# EAGLE board porcupine5v1_4 (EAGLE 6.5.0)
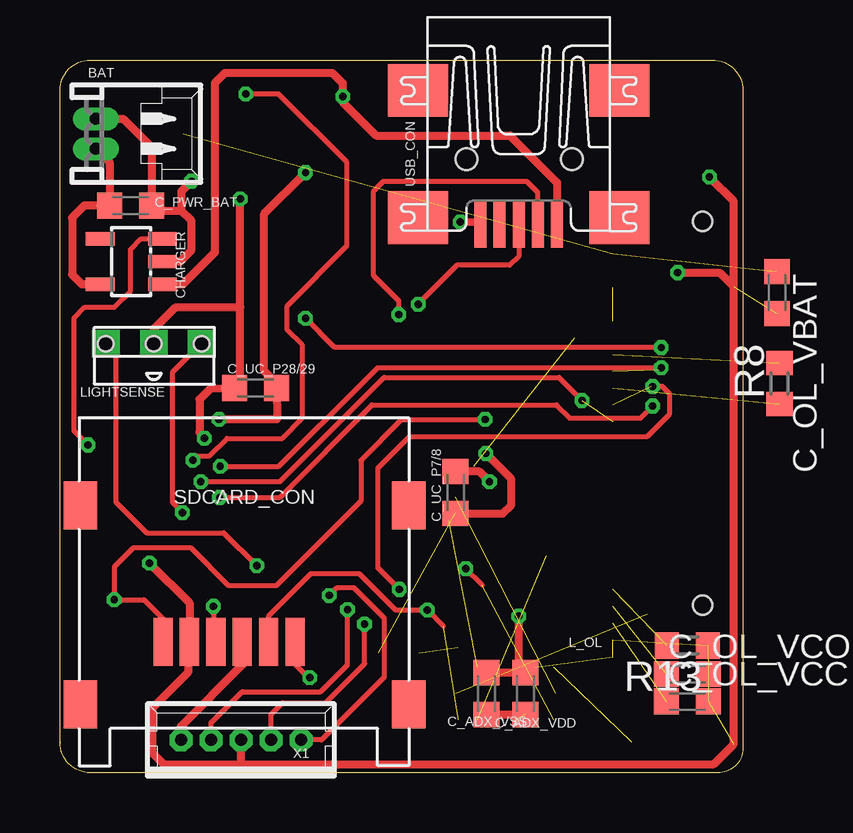
[diagram p0: board, top side]
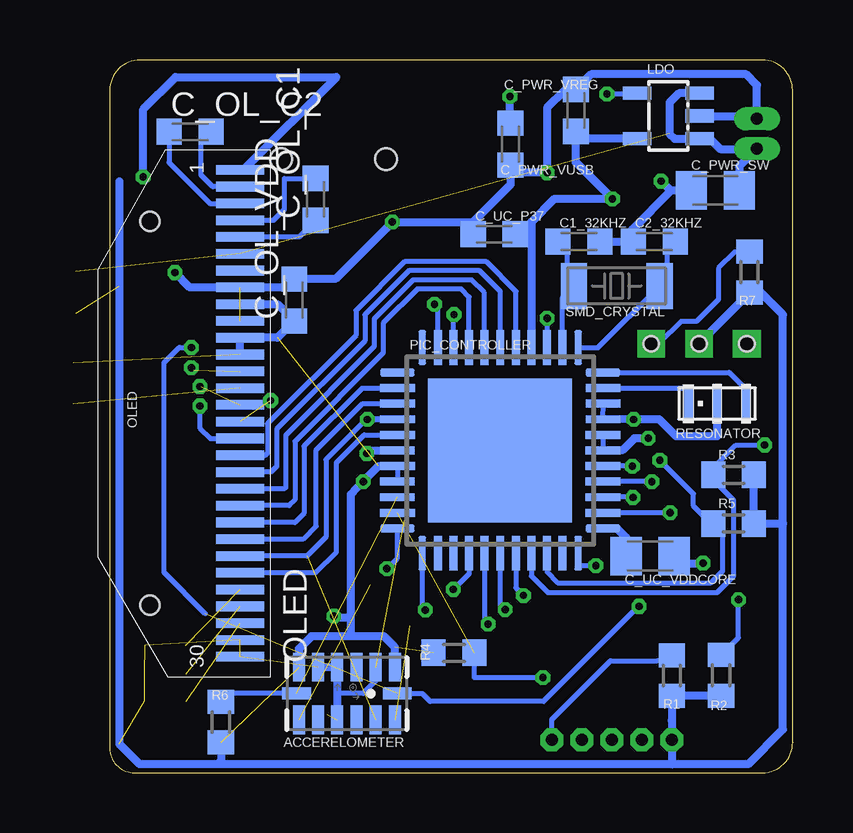
[diagram p1: board, bottom side, seen from below]

Size 28.47 x 29.72 mm. Coordinates in mm from the lower left corner, seen from the top.
Outline: 0,1.27 arc90 1.27,0 27.43,0 arc90 28.47,1.02 28.47,28.45 arc90 27.2,29.72 1.27,29.72 arc90 0,28.45 0,1.27
Outline: 0,1.27 0,1.25
Copper layers (1*16): Top 0.035mm / dielectric 1.5mm / Bottom 0.035mm
Design rules "default *": minimum track width 6mil, minimum drill 12mil, track to track 7mil, track to pad 7mil, pad to pad 7mil, via to via 7mil, smd to smd 7mil, copper to edge 6mil, drill to drill 6mil, minimum pad ring 9mil, minimum via ring 6mil, stop-mask expansion 6mil, vias tented up to drill 0mil, thermal gap 10mil

## Footprints (pad centres in the part's own frame; a part is rotated, then mirrored left to right if it is on the bottom)
PRQC-C = smd 0.4 x 1.6: 1 -1.2,0; 2_GND 0,0; 3 1.2,0
LGA14 = smd 0.5 x 1.2: 1 2,1.1; 2 1.2,1.1; 3 0.4,1.1; 4 -0.4,1.1; 5 -1.2,1.1; 6 -2,1.1; 8 -2,-1.1; 9 -1.2,-1.1; 10 -0.4,-1.1; 11 0.4,-1.1; 12 1.2,-1.1; 13 2,-1.1 | smd 1.2 x 0.5: 7 -2.1,0; 14 2.1,0
53048-02 = drill 0.5 pad 0.698 long: 1 0.625,-1.25; 2 -0.625,-1.25
C0603K = smd 1.05 x 1.08: 1 -0.875,0; 2 0.875,0
C0805K = smd 1.3 x 1.6: 1 -1,0; 2 1,0
SOT23-5L = smd 0.55 x 1.2: 1 -0.95,-1.3; 2 0,-1.3; 3 0.95,-1.3; 4 0.95,1.3; 5 -0.95,1.3
SOT-23-5 = smd 0.55 x 1.2: 1 -0.95,-1.3; 2 0,-1.3; 3 0.95,-1.3; 4 0.95,1.3; 5 -0.95,1.3
TSL = drill 0.635 pad 1.15 square: 1 -1.999,0; 2 0,0; 3 1.999,0 | hole 0.635: 0,0; -2,0; 2,0
CON_DD-12864WE-4A = smd 0.4 x 2: 1 10.15,1; 2 9.45,1; 3 8.75,1; 4 8.05,1; 5 7.35,1; 6 6.65,1; 7 5.95,1; 8 5.25,1; 9 4.55,1; 10 3.85,1; 11 3.15,1; 12 2.45,1; 13 1.75,1; 14 1.05,1; 15 0.35,1; 16 -0.35,1; 17 -1.05,1; 18 -1.75,1; 19 -2.45,1; 20 -3.15,1; 21 -3.85,1; 22 -4.55,1; 23 -5.25,1; 24 -5.95,1; 25 -6.65,1; 26 -7.35,1; 27 -8.05,1; 28 -8.75,1; 29 -9.45,1; 30 -10.15,1 | hole 0.8: -8,4.75; 8,4.75
QFN44ML8X8 = smd 1.45 x 0.33: 1 -4.282,3.25; 2 -4.285,2.6; 3 -4.285,1.95; 4 -4.285,1.3; 5 -4.285,0.65; 6 -4.287,0; 7 -4.285,-0.649; 8 -4.287,-1.3; 9 -4.287,-1.949; 10 -4.285,-2.6; 11 -4.285,-3.25; 23 4.285,-3.25; 24 4.287,-2.6; 25 4.287,-1.95; 26 4.287,-1.3; 27 4.287,-0.652; 28 4.287,0; 29 4.287,0.65; 30 4.292,1.3; 31 4.293,1.953; 32 4.293,2.602; 33 4.285,3.25 | smd 0.33 x 1.45: 12 -3.25,-4.288; 13 -2.6,-4.287; 14 -1.949,-4.287; 15 -1.3,-4.287; 16 -0.65,-4.287; 17 0,-4.287; 18 0.65,-4.287; 19 1.3,-4.287; 20 1.95,-4.287; 21 2.6,-4.287; 22 3.25,-4.285; 34 3.25,4.288; 35 2.6,4.287; 36 1.95,4.287; 37 1.3,4.285; 38 0.65,4.287; 39 0,4.287; 40 -0.649,4.287; 41 -1.3,4.287; 42 -1.949,4.287; 43 -2.6,4.287; 44 -3.25,4.288 | smd 6 x 6: EXP 0,0
R0603 = smd 1 x 1.1: 1 -0.85,0; 2 0.85,0
460DA40013 = smd 2 x 0.8: P$2 9.35,-4.75; P$3 9.35,-5.85; P$4 9.35,-6.95; P$5 9.35,-8.05; P$6 9.35,-9.15; P$7 9.35,-10.25 | smd 2 x 1.4: P$9A 11.95,0; P$9B 3.65,0; P$10A 11.95,-13.7; P$10B 3.65,-13.7
SMD_CRYSTAL = smd 1.092 x 1.905: P$1 1.794,0; P$2 -1.778,0
248601 = smd 2 x 0.5: 1 2.25,1.6; 2 2.25,0.8; 3 2.25,0; 4 2.25,-0.8; 5 2.25,-1.6 | smd 2.2 x 2.5: M1 -3.3,-4.2; M2 -3.3,4.2; M3 2,4.2; M4 2,-4.2 | hole 0.9: -0.449,-2.177; -0.447,2.21
53047-05-OCT = drill 0.5 pad 0.889 octagon: 1 2.5,0; 2 1.25,0; 3 0,0; 4 -1.25,0; 5 -2.5,0

## Placement (x,y rotation side)
12MHZ_RESONATOR  RESONATORPRQC-C  [PRQC-C]  3.15,15.39 180 bottom
ACCERELOMETER  ADXL345  [LGA14]  18.59,3.3 0 bottom
BAT  53048-02  [53048-02]  2.74,26.64 270 top
C1_32KHZ  22p  [C0603K]  8.92,22.15 0 bottom
C2_32KHZ  22p  [C0603K]  5.77,22.15 180 bottom
C_ADX_VDD  0.1u  [C0603K]  19.41,3.3 270 top
C_ADX_VSS  1u  [C0603K]  17.78,3.3 270 top
C_OL_C1  1µF  [C0603K]  19.89,23.9 90 bottom
C_OL_C2  1µF  [C0603K]  25.12,26.72 0 bottom
C_OL_VBAT  1µF  [C0603K]  29.9,20.02 270 top
C_OL_VCC  4.7µF  [C0603K]  26.16,2.97 0 top
C_OL_VCOMH  4.7µF  [C0603K]  26.16,4.11 0 top
C_OL_VDD  1µF  [C0603K]  20.78,19.71 90 bottom
C_PWR_BAT  1u  [C0603K]  2.95,23.65 0 top
C_PWR_SW  10u  [C0805K]  3.23,24.28 180 bottom
C_PWR_VREG  1u  [C0603K]  9.04,27.61 90 bottom
C_PWR_VUSB  1u  [C0603K]  11.76,26.21 270 bottom
C_UC_P7/8  0.22u  [C0603K]  16.5,11.68 270 top
C_UC_P28/29  0.22u  [C0603K]  8.16,16.04 0 top
C_UC_P37  0.1u  [C0603K]  12.44,22.45 180 bottom
C_UC_VDDCORE  10u  [C0805K]  5.94,9.04 0 bottom
CHARGER  MAX1551  [SOT23-5L]  2.97,21.31 90 top
LDO  MCP1824  [SOT-23-5]  5.18,27.38 90 bottom
LIGHTSENSE  TSL250  [TSL]  3.91,17.89 0 top
OLED  DD-12864WE-4A  [CON_DD-12864WE-4A]  22.05,14.99 90 bottom
PIC_CONTROLLER  PIC_P2V6  [QFN44ML8X8]  12.19,13.44 0 bottom
R1  10k  [R0603]  5.04,4.05 270 bottom
R2  10k  [R0603]  2.98,4.06 270 bottom
R3  10k  [R0603]  2.46,12.42 0 bottom
R4  10k  [R0603]  14.12,5.01 0 bottom
R5  10k  [R0603]  2.46,10.39 0 bottom
R6  10k  [R0603]  23.84,2.11 270 bottom
R7  10k  [R0603]  1.8,20.88 270 bottom
R8  10k  [R0603]  30,16.23 90 top
R13  400k  [R0603]  26.16,5.31 180 top
SDCARD_CON  MICROSD_CONN  [460DA40013]  14.55,14.8 270 top
SMD_CRYSTAL  SMD_CRYSTAL  [SMD_CRYSTAL]  7.34,20.29 0 bottom
USB_CON  USBCON  [248601]  19.13,25.14 270 top
X1  PROGCON  [53047-05-OCT]  7.54,1.37 0 top

## Library data of the parts
12MHZ_RESONATOR ACCERELOMETER LDO LIGHTSENSE OLED PIC_CONTROLLER SDCARD_CON SMD_CRYSTAL USB_CON X1 = HedgehogLib
BAT = con-molex; MF: MOLEX; MPN: 53048-0210; OC_FARNELL: 1012259; OC_NEWARK: 57H4718
C1_32KHZ C2_32KHZ C_ADX_VDD C_ADX_VSS C_OL_C1 C_OL_C2 C_OL_VBAT C_OL_VCC C_OL_VCOMH C_OL_VDD C_PWR_BAT C_PWR_SW C_PWR_VREG C_PWR_VUSB C_UC_P7/8 C_UC_P28/29 C_UC_P37 C_UC_VDDCORE R1-R8 R13 = rcl
CHARGER = maxim

## Nets
+3V3: ACCERELOMETER.1 ACCERELOMETER.6 C_ADX_VDD.1 C_ADX_VSS.1 C_OL_VDD.1 C_PWR_VREG.1 C_UC_P7/8.1 C_UC_P28/29.1 C_UC_P37.1 LDO.5 LIGHTSENSE.2 OLED.9 OLED.11 OLED.12 PIC_CONTROLLER.7 PIC_CONTROLLER.8 PIC_CONTROLLER.28 PIC_CONTROLLER.29 PIC_CONTROLLER.37 R1.2 R2.2 R3.2 R4.1 R5.2 R6.2 R7.2 R8.2 SDCARD_CON.P$4 X1.5
C1N: C_OL_C1.1 OLED.5
C1P: C_OL_C1.2 OLED.4
C2N: C_OL_C2.1 OLED.3
C2P: C_OL_C2.2 OLED.2
CS_ADX: ACCERELOMETER.7 PIC_CONTROLLER.9 R6.1
CS_OLED@RE2: OLED.13 PIC_CONTROLLER.27
CS_SDCARD: PIC_CONTROLLER.10 R4.2 SDCARD_CON.P$2
D0_OLED@RD0: OLED.18 PIC_CONTROLLER.38
D1_OLED@RD1: OLED.19 PIC_CONTROLLER.39
D2_OLED@RD2: OLED.20 PIC_CONTROLLER.40
D3_OLED@RD3: OLED.21 PIC_CONTROLLER.41
D4_OLED@RD4: OLED.22 PIC_CONTROLLER.2
D5_OLED@RD5: OLED.23 PIC_CONTROLLER.3
D7_OLED@RD7: OLED.25 PIC_CONTROLLER.5
D/C#_OLED@RB5: OLED.15 PIC_CONTROLLER.15
GND: 12MHZ_RESONATOR.2_GND ACCERELOMETER.2 ACCERELOMETER.4 ACCERELOMETER.5 ACCERELOMETER.10 BAT.2 C1_32KHZ.2 C2_32KHZ.2 C_ADX_VDD.2 C_ADX_VSS.2 C_OL_VBAT.2 C_OL_VCC.2 C_OL_VCOMH.2 C_OL_VDD.2 C_PWR_BAT.2 C_PWR_SW.2 C_PWR_VREG.2 C_PWR_VUSB.2 C_UC_P7/8.2 C_UC_P28/29.2 C_UC_P37.2 C_UC_VDDCORE.2 CHARGER.2 LDO.2 OLED.1 OLED.8 OLED.10 OLED.29 OLED.30 PIC_CONTROLLER.6 PIC_CONTROLLER.30 PIC_CONTROLLER.31 R13.1 SDCARD_CON.P$6 USB_CON.5 X1.3
INT_ACC@RB2: ACCERELOMETER.8 PIC_CONTROLLER.11
IREF: OLED.26 R13.2
L_GND@RA3: LIGHTSENSE.1 PIC_CONTROLLER.22
L_OUT@RA5: LIGHTSENSE.3 PIC_CONTROLLER.24 R7.1
N$1: 12MHZ_RESONATOR.1 PIC_CONTROLLER.33
N$2: 12MHZ_RESONATOR.3 PIC_CONTROLLER.32
N$3: C2_32KHZ.1 PIC_CONTROLLER.34 SMD_CRYSTAL.P$1
N$6: C1_32KHZ.1 PIC_CONTROLLER.35 SMD_CRYSTAL.P$2
POK: CHARGER.3 PIC_CONTROLLER.19 R3.1
PROG_CLK@RB6: PIC_CONTROLLER.16 X1.2
PROG_DATA@RB7: PIC_CONTROLLER.17 X1.4
PROG_MCLR@MCLR: PIC_CONTROLLER.18 R1.1 X1.1
PWRGD: LDO.4 PIC_CONTROLLER.20 R5.1
RD_OLED@RE0: OLED.17 PIC_CONTROLLER.25
RES_OLED: OLED.14 R8.1
SCLK: ACCERELOMETER.14 PIC_CONTROLLER.36 SDCARD_CON.P$5
SDI: ACCERELOMETER.13 PIC_CONTROLLER.12 SDCARD_CON.P$3
SDO_SPI&D6_OLED@RD6: ACCERELOMETER.12 OLED.24 PIC_CONTROLLER.4 R2.1 SDCARD_CON.P$7
USB_D+@RC5: PIC_CONTROLLER.43 USB_CON.3
USB_D-@RC4: PIC_CONTROLLER.42 USB_CON.2
V_BAT: BAT.1 C_OL_VBAT.1 C_PWR_BAT.1 C_PWR_SW.1 CHARGER.5 LDO.1 LDO.3 OLED.6
VCC: C_OL_VCC.1 OLED.28
VCOMH: C_OL_VCOMH.1 OLED.27
VDDCORE: C_UC_VDDCORE.1 PIC_CONTROLLER.23
VUSB: C_PWR_VUSB.1 CHARGER.1 USB_CON.1
WR_OLED@RE1: OLED.16 PIC_CONTROLLER.26

## Tracks (layer width: path | path; a pad name or v marks a point on that pad's centre or on a via)
+3V3  (via drill 0.3)  (4 unrouted)
  Top 0.33: SDCARD_CON.P$4 7.59,4.96 7.59,4.5 5.04,1.95 X1.5 | v6.02,13.95 5.82,14.2 5.82,15.57 6.27,16.03 C_UC_P28/29.1 7.52,16.04 7.52,19.41 | C_UC_P7/8.1 17.49,12.56 v17.91,12.14 | 7.52,19.41 v7.52,23.93 | LIGHTSENSE.2 3.91,18.49 4.27,18.85 4.83,19.41 7.52,19.41 | C_ADX_VSS.1 C_ADX_VDD.1 19.13,4.46 v19.13,6.53
  Bottom 0.203: PIC_CONTROLLER.8 | PIC_CONTROLLER.8 | PIC_CONTROLLER.37 10.87,17.75 10.9,17.77 | PIC_CONTROLLER.8 16.62,12.14 | PIC_CONTROLLER.29 PIC_CONTROLLER.28 | PIC_CONTROLLER.7 PIC_CONTROLLER.8
  Bottom 0.33: v6.02,13.95 6.6,13.95 7.11,13.44 PIC_CONTROLLER.28 | 0.41,10.39 0.41,1.8 1.85,0.36 5,0.36 | 0.41,10.39 0.41,19.1 1.33,20.03 R7.2 1.88,19.92 LIGHTSENSE.2 | 18.41,5.69 18.41,6.48 | 18.41,6.48 18.41,11.61 v17.91,12.14 17.26,12.79 PIC_CONTROLLER.7 | 10.9,22.38 10.9,22.96 9.93,23.93 v7.52,23.93 9.04,25.45 C_PWR_VREG.1 8.69,26.43 LDO.5 | 10.9,22.38 10.9,17.77 | 5,0.36 23.98,0.36 | 23.98,0.36 27.23,0.36 28.07,1.19 28.07,24.66 | 0.41,10.39 R5.2 R3.2 | 10.9,22.38 11.33,22.45 C_UC_P37.1 | 5,0.36 arc90 5.04,0.4 X1.5 5.04,2.18 R1.2 4.97,3.2 R2.2 | OLED.12 OLED.11 21.48,18.14 C_OL_VDD.1 21.48,19.54 OLED.9 | R6.2 23.84,0.5 23.98,0.36 | ACCERELOMETER.1 16.59,5.23 17.04,5.69 18.41,5.69 | 18.41,5.69 20.07,5.69 20.59,5.17 ACCERELOMETER.6 | v19.13,6.53 19.07,6.48 18.41,6.48
C1N
  Bottom 0.203: C_OL_C1.1 20.58,22.34 OLED.5
C1P
  Bottom 0.203: OLED.4 21.64,23.04 21.18,23.5 21.18,24.78 C_OL_C1.2
C2N
  Bottom 0.203: C_OL_C2.1 26,25.44 24.3,23.74 OLED.3
C2P
  Bottom 0.203: OLED.2 24.18,24.44 24.66,24.92 24.66,26.3 C_OL_C2.2
CS_ADX  (1 unrouted)
  Bottom 0.203: ACCERELOMETER.7 23.45,3.3 R6.1
CS_OLED@RE2  (via drill 0.3)  (1 unrouted)
  Top 0.203: v6.68,12.78 9.12,12.78 12.68,16.31 13.26,16.89 v25.07,16.89
  Bottom 0.203: PIC_CONTROLLER.27 6.8,12.79 v6.68,12.78 | v25.07,16.89 24.97,16.79
CS_SDCARD  (via drill 0.3)  (1 unrouted)
  Top 0.203: SDCARD_CON.P$2 9.8,4.53 10.36,3.96 v10.41,3.96
  Bottom 0.203: v10.41,3.96 13.27,3.96 R4.2
D0_OLED@RD0
  Bottom 0.203: PIC_CONTROLLER.38 11.53,20.07 12.78,21.31 16.18,21.31 18.21,19.28 18.21,18.24 21.89,14.55 21.89,13.34 22.02,13.21 23.02,13.21 OLED.18
D1_OLED@RD1
  Bottom 0.203: PIC_CONTROLLER.39 12.19,20.07 13.06,20.93 16,20.93 17.83,19.1 17.83,18.01 21.51,14.33 21.51,12.78 21.74,12.55 23.04,12.55 OLED.19
D2_OLED@RD2
  Bottom 0.203: PIC_CONTROLLER.40 12.85,17.73 12.85,20.02 13.39,20.55 15.82,20.55 17.45,18.92 17.45,17.78 21.13,14.07 21.13,11.89 21.18,11.84 OLED.20
D3_OLED@RD3
  Bottom 0.203: PIC_CONTROLLER.41 13.49,19.84 13.82,20.17 15.65,20.17 17.07,18.75 17.07,17.5 20.75,13.82 20.75,11.38 21,11.14 OLED.21
D4_OLED@RD4
  Bottom 0.203: PIC_CONTROLLER.2 16.49,16.03 17.96,16.03 20.37,13.61 20.37,10.82 20.75,10.44 OLED.22
D5_OLED@RD5
  Bottom 0.203: PIC_CONTROLLER.3 17.93,15.39 19.86,13.46 19.86,10.29 20.41,9.74 OLED.23
D7_OLED@RD7
  Bottom 0.203: PIC_CONTROLLER.5 17.86,14.09 19.02,12.93 19.02,9.2 19.88,8.34 OLED.25
D/C#_OLED@RB5  (via drill 0.3)  (1 unrouted)
  Top 0.203: v24.71,16.1 25.12,16.1 25.43,15.8 25.43,14.96 24.49,14.02 14.58,14.02 13.26,12.7 13.26,8.53 v14.15,7.64
  Bottom 0.203: v24.71,16.1 24.66,16.1 | PIC_CONTROLLER.15 13.49,8.3 v14.15,7.64
GND  (via drill 0.3, 0.3 pad 0.3)  (10 unrouted)
  Top 0.305: 16.2,10.52 C_UC_P7/8.2
  Top 0.33: USB_CON.5 17.42,22.97 v16.69,22.96 | v6.63,14.73 9.04,14.73 C_UC_P28/29.2 9.04,16.02 9.04,16.23 8.52,16.75 8.52,23.3 v10.24,25.02 | 7.54,0.36 27.25,0.36 28.09,1.19 28.09,20.27 | 17.78,13.28 v17.75,13.31 18.82,12.24 18.82,11.18 18.45,10.81 C_UC_P7/8.2 | 7.54,0.36 X1.3 | 28.09,20.27 28.09,23.82 v27.08,24.84 | 7.54,0.36 4.32,0.36 3.86,0.81 3.86,2.72 5.36,4.22 5.36,4.93 SDCARD_CON.P$6 5.4,7.07 v3.73,8.74 | CHARGER.2 5,21.31 5.49,21.79 5.49,23.01 5.05,23.44 | 5.05,23.44 4.03,23.44 C_PWR_BAT.2 3.82,26.07 2.63,27.27 BAT.2 | v5.49,24.66 5.05,24.23 5.05,23.44 | v25.76,20.85 27.51,20.85 28.09,20.27 | C_ADX_VSS.2 C_ADX_VDD.2
  Bottom 0.203: PIC_CONTROLLER.6 | PIC_CONTROLLER.30 PIC_CONTROLLER.31 | ACCERELOMETER.2 17.39,3.82 17.91,3.3 18.99,3.3
  Bottom 0.33: PIC_CONTROLLER.6 17.63,13.44 v17.75,13.31 | PIC_CONTROLLER.30 v6.63,14.73 5.56,14.73 4.85,14.02 3.15,14.02 12MHZ_RESONATOR.2_GND | C1_32KHZ.2 C2_32KHZ.2 6.69,22.64 5.05,24.28 | LDO.2 1.63,27.38 BAT.2 1.49,28.67 1.94,29.12 8.41,29.12 C_PWR_VREG.2 9.47,28.48 10.24,27.72 v10.24,25.02 11.44,25.02 C_PWR_VUSB.2 11.76,24.52 13.32,22.96 | 5.05,24.28 C_PWR_SW.2 | v5.49,24.66 5.11,24.28 5.05,24.28 | C_UC_VDDCORE.2 4.7,8.73 v3.73,8.74 | 13.32,22.96 v16.69,22.96 19.06,20.59 C_OL_VDD.2 21.13,20.24 OLED.8 25.14,20.24 v25.76,20.85 | 13.32,22.96 C_UC_P37.2 | v27.08,24.84 27.08,27.66 25.73,29.01 19.02,29.01 22.89,25.14 OLED.1 | ACCERELOMETER.10 18.99,3.3 ACCERELOMETER.4 ACCERELOMETER.5
INT_ACC@RB2  (via drill 0.3)  (1 unrouted)
  Top 0.203: 17.6,7.82 v16.92,8.51
  Bottom 0.203: v16.92,8.51 16.48,8.95 PIC_CONTROLLER.11
IREF  (1 unrouted)
L_GND@RA3  (via drill 0.3)
  Top 0.203: 8.2,8.66 v8.2,8.64 6.83,10.01 3.61,10.01 2.34,11.28 2.34,17.45 LIGHTSENSE.1
  Bottom 0.203: PIC_CONTROLLER.22 8.95,8.64 v8.2,8.64
L_OUT@RA5  (via drill 0.3)
  Top 0.203: v5.11,10.85 4.7,11.25 4.7,16.71 5.88,17.9 LIGHTSENSE.3
  Bottom 0.203: v5.11,10.85 5.12,10.84 PIC_CONTROLLER.24 | R7.1 2.41,21.72 3.1,21.03 3.1,19.74 4.01,18.82 4.65,18.82 5.56,17.91 LIGHTSENSE.3
N$1
  Bottom 0.203: PIC_CONTROLLER.33 2.64,16.69 1.95,16 12MHZ_RESONATOR.1
N$2
  Bottom 0.203: PIC_CONTROLLER.32 4.35,16.04 12MHZ_RESONATOR.3
N$3
  Bottom 0.203: PIC_CONTROLLER.34 8.11,17.73 SMD_CRYSTAL.P$1 5.23,20.3 5.23,21.64 C2_32KHZ.1
  Bottom 0.33: 5.61,20.3 SMD_CRYSTAL.P$1
N$6
  Bottom 0.203: PIC_CONTROLLER.35 9.6,19.82 SMD_CRYSTAL.P$2 9.4,20.3 9.4,22.15 C1_32KHZ.1
POK  (via drill 0.3)
  Top 0.203: v1.17,13.66 0.58,14.25 0.58,18.95 1.04,19.41 2.26,19.41 2.95,20.09 2.95,21.82 3.39,22.26 CHARGER.3
  Bottom 0.203: v1.17,13.66 2.36,13.66 3.31,12.71 R3.1 3.31,12.2 2.46,11.35 2.46,8.2 3.15,7.52 10.21,7.52 10.89,8.2 PIC_CONTROLLER.19
PROG_CLK@RB6  (via drill 0.3)
  Top 0.203: v12.7,6.2 12.7,4.55 11.07,2.92 9.27,2.92 8.79,2.44 X1.2
  Bottom 0.203: PIC_CONTROLLER.16 12.85,6.34 v12.7,6.2
PROG_DATA@RB7  (via drill 0.3)
  Top 0.203: v11.99,6.81 11.99,4.5 10.87,3.38 7.59,3.38 6.29,2.08 X1.4
  Bottom 0.203: PIC_CONTROLLER.17 12.2,7.01 v11.99,6.81
PROG_MCLR@MCLR  (via drill 0.3)
  Top 0.203: v11.23,7.39 11.56,7.72 12.24,7.72 13.51,6.45 13.51,3.99 10.9,1.37 X1.1
  Bottom 0.203: X1.1 10.04,2.22 7.59,4.67 5.64,4.67 5.28,4.7 R1.1 | PIC_CONTROLLER.18 11.54,7.71 v11.23,7.39
PWRGD  (via drill 0.3)
  Top 0.203: v5.54,13.03 5.71,13.21 6.22,13.21 6.96,13.95 9.27,13.95 10.11,14.78 10.11,17.83 9.47,18.47 9.47,19.46 11.96,21.97 11.96,25.45 9.12,28.3 v7.75,28.3
  Bottom 0.203: v5.54,13.03 4.14,11.63 4.14,11.12 3.72,10.71 R5.1 2.92,10 2.92,8.41 3.4,7.92 9.8,7.92 10.24,8.37 PIC_CONTROLLER.20 | LDO.4 6.52,28.3 v7.75,28.3
RD_OLED@RE0  (via drill 0.3)
  Top 0.203: v6.66,11.48 9.17,11.48 13.01,15.34 20.7,15.34 21.26,14.78 24.21,14.78 v24.71,15.29
  Bottom 0.203: PIC_CONTROLLER.25 6.66,11.49 v6.66,11.48 | v24.71,15.29 24.71,14.38 24.27,13.94 OLED.17
RES_OLED  (1 unrouted)
SCLK  (via drill 0.3)  (1 unrouted)
  Top 0.203: v10.24,18.95 11.46,17.73 v25.07,17.73 | SDCARD_CON.P$5 6.4,5.91 v6.4,6.93
  Bottom 0.203: v10.24,18.95 PIC_CONTROLLER.36 | 24.49,6.63 26.21,8.36 26.21,17.09 25.58,17.73 v25.07,17.73 | v6.4,6.93 6.43,6.93 10.39,2.97 15.12,2.97 15.45,3.3 ACCERELOMETER.14
SDI  (via drill 0.3)  (1 unrouted)
  Top 0.203: 15.98,6.12 v15.32,6.78 13.99,6.78 12.47,8.31 10.46,8.31 8.7,6.54 SDCARD_CON.P$3
  Bottom 0.203: PIC_CONTROLLER.12 15.45,6.91 v15.32,6.78
SDO_SPI&D6_OLED@RD6  (via drill 0.3)  (1 unrouted)
  Top 0.203: v17.73,14.73 14.25,14.73 12.55,13.03 12.55,11.33 9.02,7.8 7.04,7.8 5.46,9.37 3.05,9.37 2.26,8.59 v2.26,7.21 3.5,7.21 4.31,6.41 SDCARD_CON.P$7
  Bottom 0.203: v17.73,14.73 PIC_CONTROLLER.4 17.77,14.74 19.46,13.06 19.46,9.83 20.25,9.04 OLED.24 | R2.1 2.26,5.63 v2.26,7.21
USB_D+@RC5  (via drill 0.3)
  Top 0.178: 19.15,22.87 USB_CON.3
  Top 0.203: 19.15,22.87 19.15,21.57 18.75,21.16 16.56,21.16 v14.94,19.53
  Top 0.254: USB_CON.3
  Bottom 0.203: PIC_CONTROLLER.43 14.79,19.39 v14.94,19.53
USB_D-@RC4  (via drill 0.3)
  Top 0.178: 19.91,22.88 USB_CON.2 19.91,22.91
  Top 0.203: 19.91,22.91 19.91,24.21 19.46,24.66 13.49,24.66 13.08,24.26 13.08,20.73 14.12,19.68 v14.12,19.1
  Bottom 0.203: PIC_CONTROLLER.42 14.14,19.07 v14.12,19.1
V_BAT  (2 unrouted)
  Top 0.33: CHARGER.5 0.93,20.36 0.51,20.78 0.51,23.14 1.02,23.65 C_PWR_BAT.1 2.07,25.47 BAT.1
  Bottom 0.33: LDO.3 4.74,28.33 5.13,27.94 5.13,26.64 4.92,26.43 LDO.1 3.44,26.43 3.02,26.01 1.53,26.01 BAT.1 2.23,25.29 C_PWR_SW.1
VCC  (1 unrouted)
VCOMH  (1 unrouted)
VDDCORE
  Bottom 0.33: PIC_CONTROLLER.23 7.32,10.19 6.94,9.81 C_UC_VDDCORE.1
VUSB  (via drill 0.3)
  Top 0.33: USB_CON.1 20.73,24.61 18.77,26.57 13.18,26.57 11.79,27.96 v11.79,28.19 11.79,28.75 11.35,29.18 6.88,29.18 6.46,28.76 6.46,21.7 5.12,20.36 CHARGER.1
  Bottom 0.33: C_PWR_VUSB.1 11.79,27.34 v11.79,28.19
WR_OLED@RE1  (via drill 0.3)  (1 unrouted)
  Top 0.203: v5.87,12.14 9.17,12.14 13.51,16.48 20.8,16.48 v21.77,15.52
  Bottom 0.203: PIC_CONTROLLER.26 6.15,12.14 v5.87,12.14

## Text on the board
tNames: LIGHTSENSE | L_OL
bNames: SMD_CRYSTAL | OLED | RESONATOR